# Altium PCB adapter_pcb.PcbDoc
Units mm, origin at the board's own origin, x right, y up, seen from the top; angles counter-clockwise.
Board outline 84.46 x 29.97 mm, 2 copper layers (Top Layer, Bottom Layer), stack 1.18 mm thick; 112 components, 43 nets, 254 pads, 4 vias.
Unrouted connection lines stored in the file: 2.
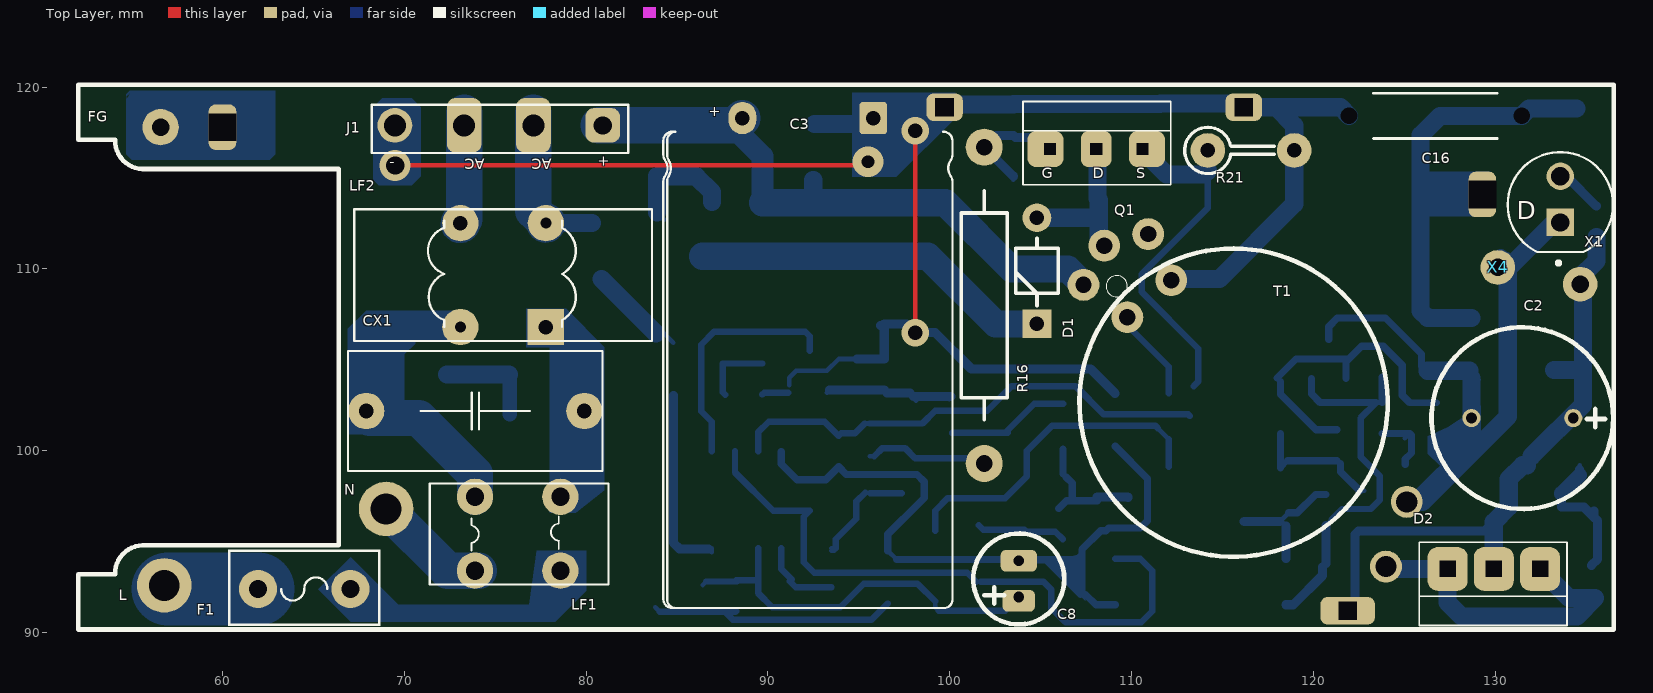
[diagram p0: Top Layer view]
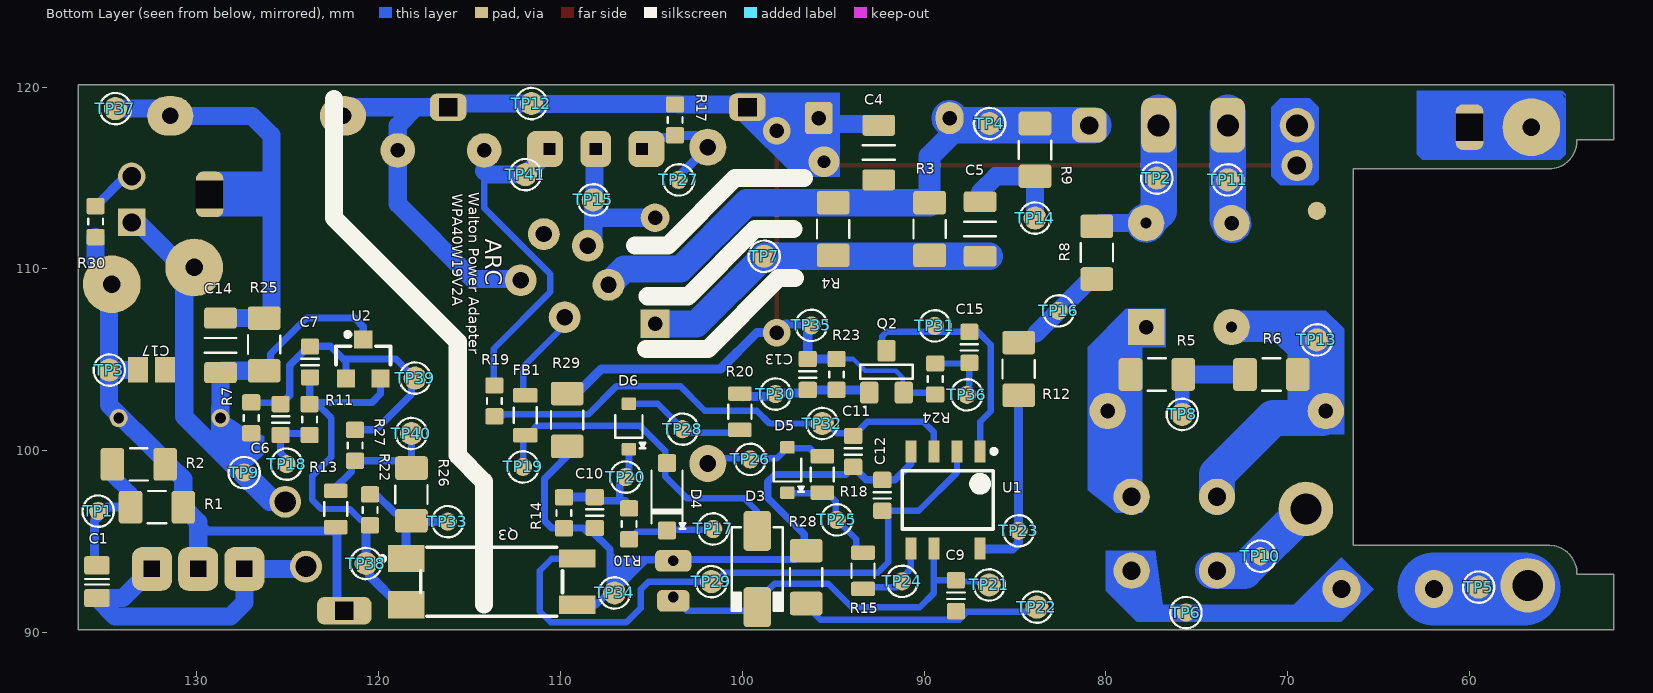
[diagram p1: Bottom Layer view, seen from below]

## Layer stack, top to bottom
Top Solder: solder mask 0.0102, Solder Resist, Dk 3.5
Top Layer: signal copper 0.0356
Dielectric 1: dielectric 1.1086, FR-4, Dk 4.8
Bottom Layer: signal copper 0.0356
Bottom Solder: solder mask 0.0102, Solder Resist, Dk 3.5

## Board outline
52.07,90.17 52.07,93.218 54.1,93.218 cw(c55.641,93.259) 55.6,94.8 66.4,94.8 66.4,115.5 55.6,115.5 cw(c55.65,117.05) 54.1,117.1 52.07,117.1 52.07,120.142 136.525,120.142 136.525,90.17

## Design rules (kind name [scope] priority, off if disabled: settings)
Clearance "Schematic Clearance Constraint" [InComponent('U1')] p1: gap=0.241 ignorepadtopadclearanceinfootprint=FALSE except(0: Arc-Hole Track-Hole SMDPad-Hole THPad-Hole Via-Hole Fill-Hole Poly-Hole Region-Hole Text-Hole)
Clearance [All] p2: gap=0.254 ignorepadtopadclearanceinfootprint=FALSE except(0: Arc-Hole Track-Hole SMDPad-Hole THPad-Hole Via-Hole Fill-Hole Poly-Hole Region-Hole Text-Hole)
PolygonConnect [All] p1: connectstyle=Relief reliefconductorwidth=0.254 reliefentries=4 polygonreliefangle="90 Angle" airgapwidth=0.254
RoutingVias [All] p1: holewidth=0.711 width=1.27 viastyle="Through Hole" minholewidth=0.711 minwidth=1.27 maxholewidth=0.711 maxwidth=1.27
SolderMaskExpansion [All] p1: expansion=0.102
Width [All] p1: maxlimit=2 minlimit=0.254 preferedwidth=0.254
30 further rules are at their usual default settings.

## Components (designator, comment, footprint, x,y, rotation, side; value= is the part's Value field where it differs from the comment)
C1 "approved sub OK" CAPC2012X135N 135.5,92.8 r90 bottom value=4µ7
C2 "680µ" CAPE4.7MM_Rad_10x17mm 131.5,101.8 r180 top
C3 "68µ" CAPAE400V68uF16X25 92.2,118.3 r180 top
C4 "approved sub OK" CAPC3216X180N 92.5,116.4 r90 bottom value=10µ
C5 "approved sub OK" CAPC3216X180N 86.922,112.2 r90 bottom value=10µ
C6 "10p" CAPC1608X90N 125.397,101.717 r270 bottom
C7 "10p" CAPC1608X90N 123.78,104.885 r270 bottom
C8 "22µ" CAPE2MM_Rad_5x11mm 103.8,92.95 r90 top
C9 "10p" CAPC1608X90N 88.25,92.03 r270 bottom
C10 "10p" CAPC1608X90N 108.118,96.601 r270 bottom
C11 "10p" CAPC1608X90N 93.9,99.967 r90 bottom
C12 "10p" CAPC1608X90N 92.3,97.55 r90 bottom
C13 "10p" CAPC1608X90N 96.4,104.2 r90 bottom
C14 "approved sub OK" CAPC3216X180N 128.7,105.8 r270 bottom value=10µ
C15 "10p" CAPC1608X90N 87.51,105.69 r270 bottom
C16 "=Value" CAPR9.5_CC 126.715,118.422 r0 top
C17 "approved sub OK" C0805 132.494,104.449 r0 bottom value=4µ7
CX1 "22n" CAPMPF0.22K275V-X2_0.22UF 73.907,102.188 r180 top
D "151054RS03000" LED_151054RS03000 133.587,113.83 r90 top
D1 "PR1007" "DO-41 - Bended Radial" 104.8,109.9 r90 top
D2 "DIODE_SCHOTTKY_V20120C_TH" DIODE_SCHOTTKY_V20120C_TH 132.43,92.3 r180 top value="Vf=1V @ 50mA"
D3 "DIODE_SCHOTTKY_10MQ100NPBF" DO-214AC 99.18,93.5 r270 bottom
D4 "100V; 1.5A" SOD123 104.143,97.47 r90 bottom value="Vf = 1.15V @ 1.5A (Max)"
D5 "DIODE_75V_500mW" SOD323 97.517,98.939 r90 bottom value="Vf=1V @ 50mA"
D6 "3.3V" SOD323 106.238,101.336 r90 bottom
F1 "Radial Lead Micro Fuse, 2.5A" FUSE_MST250 64.5,92.4 r0 top value=T2.5A250V
FB1 "600R @ 100 MHz" FBC2012N 111.934,101.95 r90 bottom
FG "Mot_A" THP_D38_T75_B125#1 56.6,117.8 r90 top (schematic designator E)
J1 "100V; 1.5A" BR_KBP208GL 75.2,117.9 r180 top value="Vf = 1.15V @ 1.5A (Max)"
L "Mot_A" THP_D38_T75_B125#2 56.8,92.6 r0 top (schematic designator X2)
LF1 "LF_Toroidal_TH" LF_Toroidal_TH 76.1,95.4 r90 top
LF2 "LF_AC_Common_Mode_Ferrite_magnet_Coil" LF_AC_Common_Mode_Ferrite_magnet_Coil 76.9,109.6 r90 top
N "Mot_A" THP_D38_T75_B125#2 69,96.8 r0 top (schematic designator X3)
Q1 "TK10A60D" MOS_TK10A60E 105.56,117.3 r0 top
Q2 "PMBS3904" SOT23-3 92.07,104.35 r90 bottom
Q3 "EL1018_TA_-VG" SOP4_Everlight_EL101X-G_MFG 113.789,92.8 r180 bottom
R1 "RES_NL_1206" RESC3216X70N 132.2,96.9 r180 bottom value=100R
R2 "RES_NL_1206" RESC3216X70N 133.2,99.257 r180 bottom value=100R
R3 "RES_NL_1206" RESC3216X70N 89.7,112.2 r270 bottom value=100K
R4 "RES_NL_1206" RESC3216X70N 95,112.2 r270 bottom value=100K
R5 "RES_NL_1206" RESC3216X70N 77.2,104.2 r180 bottom value=2M
R6 "RES_NL_1206" RESC3216X70N 70.9,104.2 r180 bottom value=2M
R7 "RES_NL_0603" RESC1608X55N 127.012,101.812 r90 bottom value="10.2K 1%"
R8 "RES_NL_1206" RESC3216X70N 80.5,110.9 r270 bottom value=0
R9 "Thick Film" RESC3216N_ZERO 83.9,116.55 r90 bottom value=0R
R10 "RES_NL_0603" RESC1608X55N 106.228,95.98 r90 bottom value=1K
R11 "RES_NL_0603" RESC1608X55N 123.8,101.715 r90 bottom value="1K 1%"
R12 "RES_NL_1206" RESC3216X70N 84.8,104.5 r270 bottom value=10K
R13 "Jumper" RESC2012N_ZERO 122.361,96.8 r90 bottom value=0R
R14 "RES_NL_0603" RESC1608X55N 109.811,96.585 r270 bottom value=100K
R15 "Thick Film" RESC2012X70N 93.36,93.4 r270 bottom value=0R
R16 "Metal Film" AXIAL-0.6-17.5mm 101.9,108 r90 top value=57.6R
R17 "RES_NL_0603" RESC1608X55N 103.7,118.2 r90 bottom value=10K
R18 "RES_NL_0805" RESC2012X70N 95.6,98.7 r90 bottom value=47R
R19 "RES_NL_0603" RESC1608X55N 113.638,102.744 r90 bottom value=499R
R20 "RES_NL_0805" RESC2012X70N 100.134,102.15 r270 bottom value=1K
R21 "Res_Com_radial_bended" "R1/4WD - p4.8" 114.201,116.52 r0 top
R22 "RES_NL_0603" RESC1608X55N 120.472,96.75 r270 bottom value="2.74K 1%"
R23 "RES_NL_0603" RESC1608X55N 94.82,104.2 r90 bottom value=10K
R24 "RES_NL_0603" RESC1608X55N 89.39,103.95 r270 bottom value=1.2K
R25 "RES_NL_1206" RESC3216X70N 126.3,105.85 r270 bottom value=1M
R26 "RES_NL_1206" RESC3216X70N 118.2,97.6 r90 bottom value=330R
R27 "RES_NL_0603" RESC1608X55N 121.3,100.3 r90 bottom value="68.1K 1%"
R28 "Thick Film" RESC3216X70N 96.49,93.05 r90 bottom value=0R
R29 "Thick Film" RESC3216N_ZERO 109.636,101.696 r90 bottom value=0R
R30 "RES_NL_0603" RESC1608X55N 135.572,112.604 r90 bottom value="1K 1%"
T1 "750811016" Transformer_THT_H_7PIN 114.6,102.65 r0 top
TP1 "TESTPOINT" TP-R60#1 135.43,96.68 r180 bottom
TP2 "TESTPOINT" TP-R60#2 77.2,115 r90 bottom
TP3 "TESTPOINT" TP-R60#2 134.815,104.439 r90 bottom
TP4 "TESTPOINT" TP-R60#2 86.4,118 r90 bottom
TP5 "TESTPOINT" TP-R60#2 59.5,92.5 r90 bottom
TP6 "TESTPOINT" TP-R60#1 75.6,91.1 r90 bottom
TP7 "TESTPOINT" TP-R60#2 98.8,110.7 r90 bottom
TP8 "TESTPOINT" TP-R60#2 75.8,102 r90 bottom
TP9 "TESTPOINT" TP-R60#1 127.4,98.8 r90 bottom
TP10 "TESTPOINT" TP-R60#1 71.5,94.2 r90 bottom
TP11 "TESTPOINT" TP-R60#2 73.3,114.9 r90 bottom
TP12 "TESTPOINT" TP-R60#2 111.6,119.1 r90 bottom
TP13 "TESTPOINT" TP-R60#2 68.4,106.1 r90 bottom
TP14 "TESTPOINT" TP-R60#2 83.9,112.8 r90 bottom
TP15 "TESTPOINT" TP-R60#2 108.2,113.8 r90 bottom
TP16 "TESTPOINT" TP-R60#1 82.6,107.7 r90 bottom
TP17 "TESTPOINT" TP-R60#1 101.6,95.7 r90 bottom
TP18 "TESTPOINT" TP-R60#1 125.065,99.263 r90 bottom
TP19 "TESTPOINT" TP-R60#1 112.06,99.112 r90 bottom
TP20 "TESTPOINT" TP-R60#1 106.418,98.552 r90 bottom
TP21 "TESTPOINT" TP-R60#2 86.42,92.62 r90 bottom
TP22 "TESTPOINT" TP-R60#2 83.8,91.4 r90 bottom
TP23 "TESTPOINT" TP-R60#1 84.8,95.6 r90 bottom
TP24 "TESTPOINT" TP-R60#1 91.21,92.82 r90 bottom
TP25 "TESTPOINT" TP-R60#1 94.8,96.2 r90 bottom
TP26 "TESTPOINT" TP-R60#1 99.564,99.527 r90 bottom
TP27 "TESTPOINT" TP-R60#1 103.5,114.9 r90 bottom
TP28 "TESTPOINT" TP-R60#1 103.285,101.188 r90 bottom
TP29 "TESTPOINT" TP-R60#2 101.7,92.8 r90 bottom
TP30 "TESTPOINT" TP-R60#1 98.17,103.12 r90 bottom
TP31 "TESTPOINT" TP-R60#1 89.41,106.87 r90 bottom
TP32 "TESTPOINT" TP-R60#2 95.6,101.5 r90 bottom
TP33 "TESTPOINT" TP-R60#1 116.2,96.1 r90 bottom
TP34 "TESTPOINT" TP-R60#2 107.029,92.18 r90 bottom
TP35 "TESTPOINT" TP-R60#1 96.2,106.9 r90 bottom
TP36 "TESTPOINT" TP-R60#1 87.65,103.08 r90 bottom
TP37 "TESTPOINT" TP-R60#2 134.485,118.819 r90 bottom
TP38 "TESTPOINT" TP-R60#2 120.7,93.8 r90 bottom
TP39 "TESTPOINT" TP-R60#2 118,104 r90 bottom
TP40 "TESTPOINT" TP-R60#2 118.2,100.95 r90 bottom
TP41 "TESTPOINT" TP-R60#2 111.93,115.19 r90 bottom
U1 "LD7750A-GR" SOP7_LD7750AGR 88.7,97.3 r270 bottom
U2 "TL431AIDBZR" SOT23_L 120.85,105.05 r90 bottom
X1 "Mot_A" THP_D38_T75_B125#3 134.677,109.164 r0 top
X4 "Mot_A" THP_D38_T75_B125#3 130.152,110.084 r0 top

## Footprints (in the part's own frame and the unit in brackets; to place one, negate y for a bottom-side part, rotate by r counter-clockwise, add the part's x,y. Pads: shape width x height; smd on the part's side, far side on the other; paste and mask are expansions set on the pad)
AXIAL-0.6-17.5mm [mil] "Axial Device, Thru-Hole; 2 Leads; 0.6 in Pin Spacing"
  round 80 hole 36: 1(-342.52,0) 2(342.52,0)
  silkscreen extent -248,-50 248,50
BR_KBP208GL [mm]
  rrect50% 1.91x1.91 hole 1: 1(-5.715,0)
  rrect50% 1.91x3 hole 1.2: 2(-1.905,0) 3(1.905,0)
  round 1.91 hole 1.2: 4(5.715,0)
  silkscreen extent -7.12,-1.14 7,1.52
C0805 [mm] "Chip Capacitor, Body 2.0x1.3mm, IPC High Density"
  rect 1.1x1.4 smd: 1(-0.75,0) 2(0.75,0)
  body extent -1.1,-0.72 1.1,0.72, height 1.4
CAPAE400V68uF16X25 [mil]
  round 20 on Mech15: 0(0,0)
  rrect25% 60x70 hole 31.5: 1(-141.73,0)
  oval 60x70 hole 31.5: 2(141.73,0)
  silkscreen extent -313,30 313,1061
CAPC1608X90N [mm] "Chip Capacitor, Body 1.6x0.8mm, EIA 0603, IPC Medium Density"
  round 0.254 on Mech15: 0(0,0)
  rrect25% 0.9x1 smd: 1(-0.85,0) 2(0.85,0)
  Top Layer pour cut-out: -0.6,0.5 -0.4,0.7 0.4,0.7 0.6,0.5 0.6,-0.5 0.4,-0.7 -0.4,-0.7 -0.6,-0.5
  silkscreen extent -0.18,-0.48 0.18,0.48, body extent -0.85,-0.45 0.85,0.45, height 0.89
CAPC2012X135N [mm] "Chip Capacitor, Body 2.0x1.2mm, EIA 0805, IPC Medium Density"
  round 0.254 on Mech15: 0(0,0)
  rrect25% 1x1.4 smd: 1(-0.9,0) 2(0.9,0)
  Top Layer pour cut-out: -0.675,0.7 -0.475,0.9 0.475,0.9 0.675,0.7 0.675,-0.7 0.475,-0.9 -0.475,-0.9 -0.675,-0.7
  silkscreen extent -0.15,-0.65 0.15,0.65, body extent -1.1,-0.72 1.1,0.73, height 1.34
CAPC3216X180N [mm] "Chip Capacitor, Body 3.2x1.6mm, 1.8mm H, EIA 1206, IPC Medium Density"
  round 0.508 on Mech15: 0(0,0)
  rrect25% 1.15x1.8 smd: 1(-1.5,0) 2(1.5,0)
  silkscreen extent -0.4,-0.88 0.4,0.88, body extent -1.7,-0.9 1.7,0.9, height 1.8
CAPE2MM_Rad_5x11mm [mm] "2mm Pitch Radial Capacitor"
  rrect50% 1.2x1.8 hole 0.6 copper offset -0.2,0: 1(-1,0)
  rrect50% 1.2x2 hole 0.6: 2(1,0)
  silkscreen extent -2.5,-2.5 2.5,2.5
CAPE4.7MM_Rad_10x17mm [mm] "2mm Pitch Radial Capacitor"
  round 1 hole 0.6: 1(-2.8,0) 2(2.8,0)
  silkscreen extent -5,-5 5,5
CAPMPF0.22K275V-X2_0.22UF [mm] "Capacitor, THT, Metallized Polyester Film with 7.2x3.0x6.5mm LxTxH"
  round 2 hole 0.8: 1(-6,0) 2(6,0)
  silkscreen extent -7,-3.3 7,3.3, body extent -6.9,-3.2 6.9,3.2, height 0.25
CAPR9.5_CC [mm] "Capacitor, CC, Thru-Hole, Dipped Radial; Body circuler Pin Spacing 9.5 mm (typ)"
  round 0 / inner round 0 / far side oval 2.54x2.159 hole 0.914 unplated: 1(-4.75,0) 2(4.75,0)
  silkscreen extent -3.4,-1.25 3.4,1.25
DIODE_SCHOTTKY_V20120C_TH [mm] "Connector; screwterm; 3 Position"
  rrect50% 2.2x2.4 hole 0.88 square: 1(-0.04,-1.2) 2(2.5,-1.2) 3(5.04,-1.2)
  silkscreen extent -1.53,-2.67 6.6,1.91
"DO-41 - Bended Radial" [mm] "Pitch- 5.8mm Lead dia- 0.8mm"
  round 1.575 hole 0.8: A(2.921,0)
  rect 1.575x1.575 / inner round 1.575 / far side rect 1.575x1.575 hole 0.8: K(-2.921,0)
  silkscreen extent -1.91,-1.17 1.78,1.17
DO-214AC [mm] "JEDEC DO214 variation AC. SMA"
  round 0.508 on Mech15: 0(0,0)
  rrect25% 2.2x1.5 smd: A(-2.1,0) K(2.1,0)
  silkscreen extent -2.3,-1.4 2.3,1.4, body extent -2.6,-1.3 2.6,1.3, height 2.42
FBC2012N [mm] "Ferrite Bead Chip, Body 2.0x1.2mm, 0805, IPC Medium Density"
  round 0.508 on Mech15: 0(0,0)
  rrect25% 0.8x1.35 smd: 1(-1.1,0) 2(1.1,0)
  silkscreen extent -0.43,-0.64 0.46,0.64, body extent -1,-0.62 1,0.63, height 0.9
FUSE_MST250 [mm]
  round 0.5 on Mech15: 0(0,0)
  round 2.1 hole 1: 1(-2.54,0) 2(2.54,0)
  silkscreen extent -4.19,-2.03 4.19,2.16, body extent -4.35,-2.16 4.35,2.29, height 0.25
LED_151054RS03000 [mm]
  round 1.508 hole 1: A(1.27,0)
  rect 1.508x1.508 hole 1: C(-1.27,0)
  silkscreen extent -3.6,-2.9 2.6,2.9
LF_AC_Common_Mode_Ferrite_magnet_Coil [mm]
  rect 2x2 hole 0.8: 1(-2.794,-0.889)
  round 2 hole 0.6: 2(2.921,-0.889) 3(-2.794,3.81)
  round 2 hole 0.8: 4(2.921,3.81)
  silkscreen extent -3.56,-6.73 3.68,9.65
LF_Toroidal_TH [mm]
  round 2 hole 1: 1(-1.994,-2.489) 2(2.07,-2.489) 3(-1.994,2.21) 4(2.07,2.21)
  silkscreen extent -2.76,-5.13 2.8,4.7
MOS_TK10A60E [mm] "Connector; screwterm; 3 Position"
  rrect50% 2x2 hole 0.64 square copper offset -0.25,0: 1(-0.04,-0.7)
  rrect50% 1.7x2 hole 0.64 square: 2(2.5,-0.7)
  rrect50% 2x2 hole 0.64 square copper offset 0.25,0: 3(5.04,-0.7)
  silkscreen extent -1.53,-2.67 6.6,1.91
"R1/4WD - p4.8" [mm] "R 1/4W, 2 Pin, Pitch - 4.8mm"
  round 1.905 hole 0.8: 1(0,0) 2(4.75,0)
  silkscreen extent -1.27,-1.28 3.65,1.28
RESC1608X55N [mm] "Chip Resistor, Body 1.6x0.8mm, EIA 0603, IPC Medium Density"
  round 0.254 on Mech15: 0(0,0)
  rrect25% 0.9x1 smd: 1(-0.85,0) 2(0.85,0)
  Top Layer pour cut-out: -0.6,0.5 -0.4,0.7 0.4,0.7 0.6,0.5 0.6,-0.5 0.4,-0.7 -0.4,-0.7 -0.6,-0.5
  silkscreen extent -0.15,-0.41 0.15,0.41, body extent -0.87,-0.47 0.88,0.48, height 0.54
RESC2012N_ZERO [mm] "Chip Resistor, Body 2.0x1.2mm, 0805, IPC Medium Density"
  round 0.254 on Mech15: 0(0,0)
  rrect25% 0.8x1.3 smd: 1(-1,0) 2(1,0)
  Top Layer pour cut-out: -0.725,0.65 -0.525,0.85 0.525,0.85 0.725,0.65 0.725,-0.65 0.525,-0.85 -0.525,-0.85 -0.725,-0.65
  silkscreen extent -0.38,-0.64 0.38,0.64, body extent -1.1,-0.67 1.1,0.68, height 0.69
RESC2012X70N [mm] "Chip Resistor, Body 2.0x1.2mm, EIA 0805, IPC Medium Density"
  round 0.254 on Mech15: 0(0,0)
  rrect25% 0.8x1.3 smd: 1(-1,0) 2(1,0)
  Top Layer pour cut-out: -0.725,0.65 -0.525,0.85 0.525,0.85 0.725,0.65 0.725,-0.65 0.525,-0.85 -0.525,-0.85 -0.725,-0.65
  silkscreen extent -0.38,-0.64 0.38,0.64, body extent -1.1,-0.67 1.1,0.68, height 0.69
RESC3216N_ZERO [mm] "Chip Resistor, Body 3.2x1.6mm, 1206, IPC Medium Density"
  round 0.508 on Mech15: 0(0,0)
  rrect25% 1.3x1.8 smd: 1(-1.45,0) 2(1.45,0)
  silkscreen extent -0.51,-0.89 0.51,0.89, body extent -1.62,-0.82 1.63,0.83, height 0.69
RESC3216X70N [mm] "Chip Resistor, Body 3.2x1.6mm, EIA 1206, IPC Medium Density"
  round 0.508 on Mech15: 0(0,0)
  rrect25% 1.3x1.8 smd: 1(-1.45,0) 2(1.45,0)
  silkscreen extent -0.51,-0.89 0.51,0.89, body extent -1.62,-0.82 1.63,0.83, height 0.69
SOD123 [mm] "SOD-123; 2 Leads; Body 2.7 x 1.6 mm, (LxW)"
  round 0.508 on Mech15: 0(0,0)
  rrect25% 1x1 smd: A(1.85,0) K(-1.85,0)
  silkscreen extent -1.75,-1 1.45,0.85, body extent -1.95,-0.9 1.95,0.9, height 1.18
SOD323 [mm] "SOD-323; 2 Leads; Body 1.8 x 1.35 mm, (LxW)"
  round 0.508 on Mech15: 0(0,0)
  rrect25% 0.7x0.8 smd: A(1.25,0) K(-1.25,0)
  silkscreen extent -1.2,-0.9 0.64,0.75, body extent -1.3,-0.68 1.3,0.67, height 1.1
SOP4_Everlight_EL101X-G_MFG [mm]
  rect 2x1.5 smd paste+0 mask+0: 1(-4.7,1.27) 2(-4.7,-1.27)
  rect 2x1 smd paste+0 mask+0: 3(4.7,-1.27) 4(4.7,1.27)
  silkscreen extent -6.13,-1.9 3.9,1.9, body extent -5.1,-1.8 5.1,1.8, height 2
SOP7_LD7750AGR [mm] "SOP, 7-Leads, Body 5x3.9mm, Pitch 1.27mm, IPC Medium Density"
  rect 1.2x0.6 smd: 1(-2.667,1.778) 2(-2.667,0.508) 3(-2.667,-0.762) 4(-2.667,-2.032) 5(2.667,-2.032) 6(2.667,-0.762) 8(2.667,1.778)
  silkscreen extent -2.79,-2.5 1.6,2.66, body extent -2,-2.5 2,2.5, height 1.76
SOT23-3 [mm] "SOT23, 3 pin"
  round 0.5 on Mech15: 0(0,0)
  rrect25% 1.2x1 smd: 1(-1.15,0.95) 2(-1.15,-0.95) 3(1.15,0)
  silkscreen extent -0.38,-1.45 0.38,1.45, body extent -1.4,-1.45 1.4,1.45, height 1.29
SOT23_L [mm] "SOT23, 3-Leads, Body 2.9x1.3mm, Pitch 0.95mm, Lead Span 2.3mm - Reverse Pinning, IPC High Density"
  rect 1x1 smd: 1(1.075,0) 2(-1.075,-0.95) 3(-1.075,0.95)
  silkscreen extent -0.3,-1.5 1.47,1.5, body extent -0.7,-1.5 0.7,1.5, height 1.1
THP_D38_T75_B125#1 [mm] "Thru-Hole Pad with 75mil top and 125mil bottom annular rings"
  round 2 / inner round 1.905 / far side round 3.175 hole 0.965: 1(0,0)
THP_D38_T75_B125#2 [mm] "Thru-Hole Pad with 75mil top and 125mil bottom annular rings"
  round 3 hole 1.7: 1(0,0)
THP_D38_T75_B125#3 [mm] "Thru-Hole Pad with 75mil top and 125mil bottom annular rings"
  round 1.905 / inner round 1.905 / far side round 3.175 hole 0.965: 1(0,0)
TP-R60#1 [mm]
  round 1 smd paste-1.27: 1(0,0)
  silkscreen extent -0.86,-0.86 0.86,0.86, body extent -0.76,-0.76 0.76,0.76, height 0.25
TP-R60#2 [mm]
  round 1.27 smd paste-1.27: 1(0,0)
  silkscreen extent -0.86,-0.86 0.86,0.86, body extent -0.76,-0.76 0.76,0.76, height 0.25
Transformer_THT_H_7PIN [mil]
  round 69 hole 35.43: 1(-240,340) 2(-285,255) 3(-145,365) 3(-95,265) 5(-190,185)
  round 69 hole 46: 6(415,-215) 9(370,-355)
  silkscreen extent -294,-334 374,334

## Part data
C1 C17: library part CAPC_4u7_0805, "Capacitor SMD Cer 4.7uF 10% 16V X5R 0805", Manufacturer 1="Taiyo Yuden", Manufacturer 2="Samsung Electro-Mechanics America, Inc", Manufacturer 3=Kemet, Manufacturer 4="Murata Electronics North America", Manufacturer 5="TDK Corporation", Manufacturer Part Number 1=EMK212BJ475KG-T, Manufacturer Part Number 2=CL21A475KOFNNNE, Manufacturer Part Number 3=C0805C475K4PACTU, Manufacturer Part Number 4=GRM21BR61C475MA88L, Manufacturer Part Number 5=C2012X5R1C475K125AC, Operating Temperature="-55°C ~ 85°C", Package / Case="0805 (2012 Metric)", Ratings="16V; X5R", Supplier Part Number 1=587-1294-1-ND, Tolerance=±10%, ComponentLink1Description=http://www.yuden.co.jp/productdata/catalog/en/mlcc01_e.pdf, ComponentLink1URL=http://www.yuden.co.jp/productdata/catalog/en/mlcc01_e.pdf, ComponentLink2Description=http://www.samsungsem.com/servlet/FileDownload?type=spec&file=CL21A475KOFNNNE.pdf, ComponentLink2URL=http://www.samsungsem.com/servlet/FileDownload?type=spec&file=CL21A475KOFNNNE.pdf, ComponentLink3Description=http://capacitoredge.kemet.com/capedge2/DataSheet?pn=C0805C475K4PACTU, ComponentLink3URL=http://capacitoredge.kemet.com/capedge2/DataSheet?pn=C0805C475K4PACTU, ComponentLink4Description=http://psearch.murata.com/capacitor/product/GRM21BR61C475MA88#.pdf, ComponentLink4URL=http://psearch.murata.com/capacitor/product/GRM21BR61C475MA88#.pdf, ComponentLink5Description=http://product.tdk.com/capacitor/mlcc/en/documents/mlcc_commercial_general_en.pdf, ComponentLink5URL=http://product.tdk.com/capacitor/mlcc/en/documents/mlcc_commercial_general_en.pdf, Material=ceramic, RoHS 1="RoHS Compliant", RoHS 2="RoHS Compliant", RoHS 3="RoHS Compliant", RoHS 4="RoHS Compliant", RoHS 5="RoHS Compliant", SCDType=spec, Size / Dimension="0.079\" L x 0.049\" W (2.00mm x 1.25mm)", Supplier 1=Digi-Key, Supplier 2=Digi-Key, Supplier 3=Digi-Key, Supplier 4=Digi-Key, Supplier 5=Digi-Key, Supplier Part Number 2=1276-1065-1-ND, Supplier Part Number 3=399-8101-1-ND, Supplier Part Number 4=490-7215-1-ND, Supplier Part Number 5=445-7640-1-ND, Thickness (Max)="0.053\" (1.35mm)"
C2: library part CAPE_680u_25V_THT, "Capacitor THT Alum Elec 680uF 25V", Manufacturer 1="Panasonic - ECG", Manufacturer Part Number 1=EEU-ED2D330, Package / Case=Radial, Ratings="200V; 105°C", Supplier Part Number 1=P13523-ND, Tolerance=±20%, Material=Al, SCDType=undef, Supplier 1=Digi-Key
C3: library part CAPE_68u_400V_THT, "Capacitor THT Alum Elec 68uF 20% 400V", Manufacturer 1="Panasonic - ECG", Manufacturer Part Number 1=EEU-ED2D330, Package / Case=Radial, Ratings="200V; 105°C", Supplier Part Number 1=P13523-ND, Tolerance=±20%, Material=Al, SCDType=undef, Supplier 1=Digi-Key
C4 C5 C14: library part CAPC_10u_1206_16V, "Capacitor SMD Cer 10uF 10% 16V X7R 1206", Manufacturer 1=Kemet, Manufacturer Part Number 1=C1206C106K4RACTU, Package / Case="1206 (3216 metric)", Ratings="16V; X7R", Supplier Part Number 1=399-3525-1-ND, Tolerance=±10%, Material=ceramic, SCDType=spec, Supplier 1=Digi-Key
C6 C7 C9 C10 C11 C12 C13 C15: library part CAPC_10p_0603_NP0_1%_50V, "Capacitor SMD Cer 10pF 5% 50V NP0 0603", Manufacturer 1="Murata Electronics North America", Manufacturer Part Number 1=GRM1885C1H100FA01J, Operating Temperature="-55°C ~ 125°C", Package / Case="0603 (1608 Metric)", Ratings="50V; NP0", Supplier Part Number 1=GRM1885C1H100FA01J-ND, Tolerance=±5%, SCDType=spec, Size / Dimension="0.063\" L x 0.032\" W (1.60mm x 0.81mm)", Supplier 1=Digi-Key, Thickness (Max)="0.035\" (0.90mm)"
C8: library part CAPE_22u_50V_THT, "Capacitor THT Alum Elec 22uF 50V", Manufacturer 1="Panasonic - ECG", Manufacturer Part Number 1=EEU-ED2D330, Package / Case=Radial, Ratings="200V; 105°C", Supplier Part Number 1=P13523-ND, Tolerance=±20%, Material=Al, SCDType=undef, Supplier 1=Digi-Key
C16: library part CAPC_4KVV_CR, "Capacitor THD Ceramic 4KV", Manufacturer 1="Panasonic - ECG", Manufacturer Part Number 1=ECQ-E1474KF, Package / Case="12.5L x 4.5T x 9.0H x 10.0mm Pitch", Ratings=100V, Supplier Part Number 1=EF1474-ND, Tolerance=±10%, Material="Metallized Polyester", SCDType=undef, Supplier 1=Digi-Key
CX1: library part CAPMPF_22n_250V_MP, "Safety Capacitor THD MP Film 22nF 10% 250V", Manufacturer 1="Panasonic - ECG", Manufacturer Part Number 1=ECQ-E2223KF, Package / Case="12.0L x 5.5T x 9.0H x 10.0mm Pitch", Ratings=250V, Supplier Part Number 1=EF2223-ND, Tolerance=±10%, Material="Metallized Polyester", SCDType=undef, Supplier 1=Digi-Key
D: "Red 623nm LED Indication - Discrete 1.9V Radial", Package="Radial Würth Elektronik", Availability=Unavailable, MF="Wurth Electronics", MP=151054RS03000, Price=None, SnapEDA_Link=https://www.snapeda.com/parts/151054RS03000/Wurth%20Electronics%20Inc./view-part/609365/?ref=snap
D1: "Fast Recovery Rectifier Diode, 2-Pin Axial_Lead, Pb-Free, Bulk Box", Manufacturer="On Semiconductor", PartNumber=1N4003FF, Supplier Part Number 1=863-1N4003FF, ComponentLink1Description="Manufacturer URL", ComponentLink1URL=http://www.onsemi.com/, ComponentLink2Description=Datasheet, ComponentLink2URL=http://www.onsemi.com/pub_link/Collateral/1N4001-D.PDF, ComponentLink3Description="Package Specification", ComponentLink3URL=http://www.onsemi.cn/pub_link/Collateral/59-10.PDF, DatasheetVersion="Rev. 13", IFSM Max (A)=30, IO(rec) Max (A)=1, Mounting Technology="Through Hole", PackageDescription="2-Pin, Axial Lead, Diameter 2.35 mm", PackageReference=AXIAL_LEAD-2-59-10, PackageVersion="Rev. U, 02/2005", Packing="Bulk Box", RoHS=TRUE, Supplier 1=Mouser, Type="Standard Recovery", VRRM Max (V)=200
D2: "SCHOTTKY RECTIFIER TO-220AB COMMON CATHODE THROUGH HOLE", Manufacturer="Micro Commercial Co", Manufacturer Part Number=V20120C, Package / Case=SOD323, Ratings="75V; 300mA; 0.5W", Supplier Part Number 1=1N4148WXTPMSCT-ND, Diode Type=Standard, Material=Si, SCDType=source, Supplier 1=Digi-Key
D3: "Diode Schottky SMD 100V 2A SMA", Manufacturer 1="Micro Commercial Co", Manufacturer Part Number 1=SS210-TP, Package / Case="DO-214AC, SMA", Ratings="100V; 2A", Supplier Part Number 1=SS210-TPMSCT-ND, Diode Type=Schottky, Material=Si, Mounting Type="Surface Mount", SCDType=source, Speed="Fast Recovery =< 500ns, > 200mA (Io)", Supplier 1=Digi-Key
D4: library part DIODE_switching_SJ_SOD_1-3, "surface mount switching diode L1N4148WT1G", Manufacturer 1="Diodes Inc", Manufacturer Part Number 1=SJ, Package / Case="DO-214AC, SMA", Supplier Part Number 1=S2BA-FDICT-ND, Diode Type=Standard, Material=Si, Ratings="100V; 1.5A", SCDType=source, Supplier 1=Digi-Key
D5: "Diode SMD 300mA 0.5W SOD323", Manufacturer="Micro Commercial Co", Manufacturer Part Number=1N4148WX-TP, Package / Case=SOD323, Ratings="75V; 300mA; 0.5W", Supplier Part Number 1=1N4148WXTPMSCT-ND, Diode Type=Standard, Material=Si, SCDType=source, Supplier 1=Digi-Key
D6: library part DIODE_ZENER_3V3_SOD323, "Diode Zener SMD 3.3V 200mW SOD-323", Manufacturer 1="ON Semiconductor", Manufacturer Part Number 1=MM3Z3V3ST1G, Package / Case=SOD-323, Ratings="3.3V; 0.2W; Vf=900mV @ 10mA", Supplier Part Number 1=MM3Z3V3ST1GOSCT-ND, Tolerance=±3%, Diode Type=Zener, Material=Si, SCDType=source, Supplier 1=Digi-Key
F1: library part FUSE_MST_2.5A_250V, "Radial Lead Micro Fuse, 2.5A TH", Manufacturer 1="Cooper Bussmann", Manufacturer Part Number 1=0603ESDA-TR1, Package / Case="0603 (1608 metric)", Supplier Part Number 1=283-2535-1-ND, Voltage - Clamping=35V, Voltage - Working=24V, ComponentLink1Description=http://www.cooperindustries.com/content/dam/public/bussmann/Electronics/Resources/Data%20Sheets/Bus_Elx_DS_4082_0603ESDA-TR.pdf, ComponentLink1URL=http://www.cooperindustries.com/content/dam/public/bussmann/Electronics/Resources/Data%20Sheets/Bus_Elx_DS_4082_0603ESDA-TR.pdf, SCDType=spec, Supplier 1=Digi-Key
FB1: library part FERRITE_WURTH_742792042, "Ferrite bead Wurth 742792042 SMD 200mA 0805", Current Rating=200mA, DC Resistance (DCR)="500 mOhm Max", Impedance @ Frequency="600 Ohm @ 100MHz", Manufacturer 1="WURTH ELEKTRONIK", Manufacturer Part Number 1=742792042, Package / Case="0805 (2012 Metric)", Ratings="200 mA; 500 mOhm DC", Supplier Part Number 1=08P2373, ComponentLink1Description=http://katalog.we-online.de/kataloge/eisos/media/pdf/742792042.pdf, ComponentLink1URL=http://katalog.we-online.de/kataloge/eisos/media/pdf/742792042.pdf, Filter Type="Differential Mode - Single", Height (Max)="0.041\" (1.05mm)", SCDType=source, Size / Dimension="0.063\" L x 0.031\" W (1.60mm x 0.80mm)", Supplier 1=Newark
FG L N X1 X4: library part Term1
J1: library part BR_KBP208GL_TH, "KBP208GL GLASS PASSIVATED BRIDGE RECTIFIER", Manufacturer 1="Diodes Inc", Package / Case="DO-214AC, SMA", Supplier Part Number 1=S2BA-FDICT-ND, Diode Type=Standard, Material=Si, Ratings="100V; 1.5A", SCDType=source, Supplier 1=Digi-Key
LF1: "Toroidal line filter common-mode choke TH", Manufacturer 1="Wurth Electronics Inc", Manufacturer Part Number 1=744232222, Package / Case="Horizontal, 4 PC Pad", Ratings="2.2k Ohms at 100MHz", Supplier Part Number 1=732-1474-1-ND, ComponentLink1Description="744232222 datasheet", ComponentLink1URL=http://katalog.we-online.de/kataloge/eisos/media/pdf/744232222.pdf, Height (Max)="0.083\" (2.10mm)", Impedance="2200 Ohm at 100 MHz", PackageDescription="SMD Inductor, 4-Leads, Body 1.8 x 3.4 mm", SCDType=source, Supplier 1=Digi-Key
LF2: "AC Common Mode Ferrite magnet Chokes", Manufacturer 1="Wurth Electronics Inc", Manufacturer Part Number 1=744232222, Package / Case="Horizontal, 4 PC Pad", Ratings="2.2k Ohms at 100MHz", Supplier Part Number 1=732-1474-1-ND, ComponentLink1Description="744232222 datasheet", ComponentLink1URL=http://katalog.we-online.de/kataloge/eisos/media/pdf/744232222.pdf, Height (Max)="0.083\" (2.10mm)", Impedance="2200 Ohm at 100 MHz", PackageDescription="SMD Inductor, 4-Leads, Body 1.8 x 3.4 mm", SCDType=source, Supplier 1=Digi-Key
Q1: library part MOSFET_N-CH_TK10A60D, "MOSFET N-Channel Power Switching TH", Manufacturer 1="Renesas Electronics America", Package / Case="8-WDFN exposed pad", Ratings="30V; 30A", Supplier Part Number 1=RJK03M7DPA-00#J5A, ComponentLink1Description=http://documentation.renesas.com/doc/products/transistor/r07ds0773ej0110_rjk03m7dpa.pdf, ComponentLink1URL=http://documentation.renesas.com/doc/products/transistor/r07ds0773ej0110_rjk03m7dpa.pdf, Manufacturer Part Number 1=TK10A60D, SCDType=undef, Supplier 1="QuadRep Northwest, Inc."
Q2: library part NPN_PMBS3904_PHILIPS, "Transistor SMD NPN 40V 100mA 250mW SOT23", Manufacturer 1="Fairchild Semiconductor", Manufacturer 2="NXP Semiconductors", Manufacturer Part Number 1=MMBT2222A, Package / Case=SOT-23, Ratings="40V; 600mA; 250mW", Supplier Part Number 1=MMBT2222AFSTR-ND, Manufacturer Part Number 2=MMBT2222A, Material=Si, Mounting Type="Surface Mount", SCDType=source, Supplier 1=Digi-Key, Supplier 2=Digi-Key, Supplier Part Number 2=568-4509-2-ND
R1 R2 R3 R4 R5 R6 R8 R12 R25 R26: "Resistor, SMD chip", Package / Case="1206 (3216 metric)"
R7 R10 R11 R14 R17 R19 R22 R23 R24 R27 R30: "Resistor, SMD chip", Package / Case="0603 (1608 metric)"
R9 R15 R28 R29: library part RES_0R_1206, "Resistor SMD chip 0.0 Ohm 0.25W 1206", Manufacturer 1=Vishay/Dale, Manufacturer Part Number 1=CRCW12060000Z0EA, Package / Case="1206 (3216 metric)", Ratings=1/4W, Supplier Part Number 1=541-0.0ECT-ND, Tolerance=±5%, SCDType=spec*\?, Supplier 1=Digi-Key
R13: library part RES_0R_0805, "Resistor SMD chip 0.0 Ohm 0.125W 0805", Manufacturer 1="Samsung Electro-Mechanics America, Inc", Manufacturer 2="Stackpole Electronics Inc", Manufacturer 3=Yageo, Manufacturer 4="Panasonic Electronic Components", Manufacturer 5="Rohm Semiconductor", Manufacturer Part Number 1=RC2012J000CS, Manufacturer Part Number 2=RMCF0805ZT0R00, Manufacturer Part Number 3=RC0805JR-070RL, Manufacturer Part Number 4=ERJ-6GEY0R00V, Manufacturer Part Number 5=MCR10ERTJ000, Package / Case="0805 (2012 metric)", Ratings=1/8W, Supplier Part Number 1=1276-5466-6-ND, Tolerance=N/A, ComponentLink1Description=http://www.samsungsem.com/servlet/FileDownload?filename=productcatalog/pdf/Chip_Resistor.pdf, ComponentLink1URL=http://www.samsungsem.com/servlet/FileDownload?filename=productcatalog/pdf/Chip_Resistor.pdf, ComponentLink2Description=http://www.seielect.com/Catalog/SEI-RMCF_RMCP.pdf, ComponentLink2URL=http://www.seielect.com/Catalog/SEI-RMCF_RMCP.pdf, ComponentLink3Description=http://media.digikey.com/pdf/Data%20Sheets/Yageo%20PDFs/RC0805%20Pb%20Free.pdf, ComponentLink3URL=http://media.digikey.com/pdf/Data%20Sheets/Yageo%20PDFs/RC0805%20Pb%20Free.pdf, ComponentLink4Description=http://industrial.panasonic.com/www-cgi/jvcr13pz.cgi?E+PZ+3+AOA0001+ERJ6GEY0R00V+7+WW, ComponentLink4URL=http://industrial.panasonic.com/www-cgi/jvcr13pz.cgi?E+PZ+3+AOA0001+ERJ6GEY0R00V+7+WW, ComponentLink5Description=http://rohmfs.rohm.com/en/products/databook/datasheet/passive/resistor/chip_resistor/mcr_g.pdf, ComponentLink5URL=http://rohmfs.rohm.com/en/products/databook/datasheet/passive/resistor/chip_resistor/mcr_g.pdf, RoHS 1="RoHS Compliant", RoHS 2="RoHS Compliant", RoHS 3="RoHS Compliant", RoHS 4="RoHS Compliant", RoHS 5="RoHS Compliant", SCDType=spec, Supplier 1=Digi-Key, Supplier 2=Digi-Key, Supplier 3=Digi-Key, Supplier 4=Digi-Key, Supplier 5=Digi-Key, Supplier Part Number 2=RMCF0805ZT0R00DKR-ND, Supplier Part Number 3=311-0.0ARDKR-ND, Supplier Part Number 4=P0.0ADKR-ND, Supplier Part Number 5=RHM0.0CPDKR-ND
R16: library part RES_10R_Axial_1W_5%, "Resistor THD 10 Ohm 1W 5% Metal Film", Manufacturer 1="Vishay/BC Components", Manufacturer Part Number 1=PR01000101009JR500, Package / Case="2.5x8.0mm DxL", Ratings=1W, Supplier Part Number 1=PPC10W-1CT-ND, Tolerance=±5%, SCDType=spec, Supplier 1=Digi-Key
R18 R20: "Resistor, SMD chip", Package / Case="0805 (2012 metric)"
R21: "4.59K +/-0.5%"
T1: "Flyback Converters For For AC/DC Converters SMPS Transformer 4500Vrms Isolation Through Hole", Package="Wurth Electronics", Availability=Unavailable, MF="Wurth Electronics", MP=750811016, Price=None, SnapEDA_Link=https://www.snapeda.com/parts/750811016/Wurth%20Electronics%20Midcom/view-part/2709313/?ref=snap
TP1 TP2 TP3 TP4 TP5 TP6 TP7 TP8 TP9 TP10 TP11 TP12 TP13 TP14 TP15 TP16 TP17 TP18 TP19 TP20 TP21 TP22 TP23 TP24 TP25 TP26 TP27 TP28 TP29 TP30 TP31 TP32 TP33 TP34 TP35 TP36 TP37 TP38 TP39 TP40 TP41: "SMD test pin"
U1: library part PWM_CONT_LD7750A-GR, "PWM CONTROLLER LD7750AGR SOP-7", Manufacturer 1="ON Semiconductor", Manufacturer Part Number 1=CAT93C46YI-G, Operating Temperature="-40°C ~ 85°C", Package / Case=8-TSSOP, Supplier Part Number 1=CAT93C46YI-G-ND, Voltage - Supply="1.8 V ~ 5.5 V", ComponentLink1Description=http://www.onsemi.com/pub_link/Collateral/CAT93C46-D.PDF, ComponentLink1URL=http://www.onsemi.com/pub_link/Collateral/CAT93C46-D.PDF, Format - Memory="EEPROMs - Serial", Interface="Microwire, 3-Wire Serial", Memory Size="1K (128 x 8 or 64 x 16)", Memory Type=EEPROM, Rule="Clearance Constraint [Clearance = 9.5mil]", SCDType=spec, Speed=2MHz, Supplier 1=Digi-Key, Supplier Device Package=8-TSSOP
U2: "Adjustable Precision Shunt Regulator, 34 ppm / degC, 100 mA, -40 to 85 degC, 3-pin SOT-23 (DBZ), Green (RoHS & no Sb/Br)", Manufacturer="Texas Instruments", Rating=Catalog, Temp Coeff(Max)(ppm/ degree C)=92, Temp Coeff(Typ)(ppm/ degree C)=34, Code_JEDEC=TO-236, ComponentLink1Description="Manufacturer URL", ComponentLink1URL=http://www.ti.com/, ComponentLink2Description=Datasheet, ComponentLink2URL=http://www.ti.com/general/docs/lit/getliterature.tsp?genericPartNumber=TL431A&fileType=pdf, ComponentLink3Description="Package Specification", ComponentLink3URL=http://www.ti.com/litv/pdf/mpds108a, DatasheetVersion=SLVS543M, Eco-Plan="Green (RoHS & no Sb/Br)", Initial Accuracy @ 25/deg C(%)=1, Iout/Iz(Max)(mA)=100, Min Iz for Regulation(uA)=600, Mounting Technology="Surface Mount", PackageDescription="3-Pin Plastic Small Outline, Body 2.92 x 1.3 mm, Pitch 0.95 mm", PackageReference=DBZ3, PackageVersion=4203227/B, PartNumber=TL431AIDBZR, SubFamily="Shunt Voltage Reference", VO Adj(Max)(V)=36, VO Adj(Min)(V)=2.495

## Free pads (board coordinates)
  round 1 smd far side paste+0 mask+1: 4(68.4,113.2)
  rrect50% 1.524x2.5 hole 1.5 square: 7(60,117.8)
  rrect50% 1.5x2.5 hole 1.5 square: 8(129.3,114.1)
  rrect50% 2x1.5 hole 1 square: 9(99.72,118.9) 10(116.18,118.9)
  rrect50% 3x1.5 hole 1 square: 11(121.89,91.2)

## Via types
v1: diameter 1.5, hole 0.8, Top Layer to Bottom Layer, 2 vias
v2: diameter 1.7, hole 0.711, Top Layer to Bottom Layer, 1 vias
v3: diameter 1.7, hole 1, Top Layer to Bottom Layer, 1 vias

## Nets (pads, with @x,y where several pads share a name; then routed paths per layer and width w, separated by ;. In a path a pad name is that pad's centre, name@x,y a point inside that pad or via, vN(x,y) a via of type N, cw(c..) or ccw(c..) an arc to the next point about the centre after c; other vN are vias at no path point)
GND: C2.2 C3.1 C4.2 C13.2 C14.2 C16.1 C17.1 D.C J1.4 pad.9 pad.10 Q2.2 R7.1 R17.2 R21.2 R23.2 R24.2 R25.2 R29.2 T1.3 T1.6 TP9.1 TP12.1 TP35.1 U2.1 X4.1 | length 150.7
  Top Layer w0.254: v3(69.5,115.7) 94.9,115.7 95.1,115.9 v2(95.5,115.9) ; v1(98.1,106.5) v1(98.1,117.6)
  Bottom Layer w0.254: v3@69.485,115.715 v3(69.5,115.7) ; Q2.2@91.17,103.61 91.17,104.02 91.55,104.4 93.25,104.4 93.9,105.05 R23.2 R23.2@94.9,105.05 ; C4.2 C4.2@92.566,117.966 ; v2@95.328,116.128 95.328,116.072 v2(95.5,115.9) ; C3.1@95.328,117.828 95.466,117.966 C3.1 95.8,118.294 C3.1@96.43,117.664 ; v1@97.62,106.98 v1(98.1,106.5) ; v1@98.036,117.664 v1(98.1,117.6) 98.6,118.1 99.4,118.1 ; R17.2@103.5,119.05 R17.2@103.525,119.075 ; TP12.1@111.575,119.075 TP12.1 ; T1.6 128.7,100.748 C2.2 ; R25.2@125.954,104.656 126.21,104.4 R25.2 ; C14.2@128.6,104.4 C14.2 ; C14.2@128.883,104.3 C14.2 ; C14.2@129.1,103.9 C14.2
  Bottom Layer w0.35: R24.2@89.7,103.1 89.8,103.2 Q2.2
  Bottom Layer w0.4: U2.1 120.85,106.829 121.321,107.3 123.973,107.3 125.954,105.319 R25.2@125.954,104.656
  Bottom Layer w0.5: R23.2@94.9,105.05 C13.2 TP35.1@96.4,106.7 ; TP35.1 TP35.1@96.4,106.7 ; v1@97.62,106.98 96.4,106.98 TP35.1@96.4,106.7 ; v1(98.1,106.5) 99.2,106.5 101.2,104.5 107.75,104.5 R29.2@109.1,103.15
  Bottom Layer w0.8: X4.1@130.31,110.69 X4.1@130.534,110.466 ; X4.1@130.7,110.3 X4.1@130.845,110.155
  Bottom Layer w1: v3@69.485,115.715 J1.4 ; C4.2@92.566,117.966 C3.1@95.466,117.966 ; v2@95.328,116.128 C3.1@95.328,117.828 ; C3.1@96.43,117.664 v1@98.036,117.664 ; 99.4,118.1 100.35,119.05 R17.2@103.5,119.05 ; R17.2@103.525,119.075 TP12.1@111.575,119.075 ; TP12.1 pad.10@116.18,119.1 ; T1.3@112.187,109.381 112.26,109.454 114.833,109.454 118.95,113.571 118.95,117.889 117.939,118.9 ; pad.10 117.939,118.9 ; C16.1 121.487,118.9 117.939,118.9 ; T1.6 126.006,97.189 130.7,101.883 X4.1@130.7,110.3 ; R25.2 C14.2@128.6,104.4 ; C2.2 C14.2@128.7,104 ; X4.1 X4.1@130.534,110.466 ; X4.1@130.845,110.155 133.249,112.56 D.C
NetC1_1: C1.1 D2.1 D2.3 T1.9 | length 17.8
  Bottom Layer w1: T1.9 124.131,93.5 D2.3 127.39,91.662 128.159,90.893 134.493,90.893 C1.1 134.07,91.9 D2.1
NetC1_2: C1.2 R1.1 R2.1 TP1.1 | length 7.9
  Bottom Layer w0.254: R2.1@134.65,98.969 R2.1@134.65,99.2
  Bottom Layer w0.5: R1.1@133.65,97.65 R1.1 134.89,96.9 TP1.1@135.43,96.36 ; R2.1@134.65,98.65 R2.1@134.65,98.969 ; C1.2@135.3,93.7 135.64,94.04 135.64,96.15 TP1.1@135.43,96.36 ; TP1.1 TP1.1@135.43,96.36
  Bottom Layer w0.8: R1.1@133.65,97.65 R2.1@134.65,98.65
NetC3_1: C3.2 C4.1 J1.1 R3.1 R4.1 R9.2 T1.2 TP4.1 | length 34
  Bottom Layer w0.254: 88.6,117.3 C3.2 ; 92.5,113.65 92.5,114
  Bottom Layer w1: 92.5,114 C4.1
  Bottom Layer w1.2: 88.6,117.3 89.7,116.2 R3.1
  Bottom Layer w1.5: R3.1 92.5,113.65 R4.1 99.75,113.65 103.4,110 106.488,110 T1.2
  Bottom Layer w2: J1.1@80.7,117.9 J1.1 88.2,117.9 C3.2
NetC5_1: C5.1 D1.K R3.2 R4.2 TP7.1 | length 19.9
  Bottom Layer w1.5: C5.1@86.4,110.7 C5.1 95,110.7 TP7.1 102.521,106.979 D1.K
NetC5_2: C5.2 R9.1 TP14.1 | length 6.5
  Bottom Layer w0.254: TP14.1@83.9,113.1 TP14.1@84.3,112.7
  Bottom Layer w1: TP14.1@83.9,113.1 R9.1 86.06,115.1 86.922,114.238 C5.2
NetC6_1: C6.1 C7.1 R7.2 R27.2 TP39.1 U2.3 | length 17.8
  Bottom Layer w0.254: TP39.1 TP39.1@118.194,103.806 ; C7.1@123.8,105.75 C7.1@123.85,105.75
  Bottom Layer w0.354: C6.1@125.3,102.65 R7.2@126.8,102.65
  Bottom Layer w0.4: TP39.1 119.05,105.05 121.95,105.05 ; TP39.1@118.194,103.806 118.194,103.106 120.15,101.15 R27.2 ; U2.3 121.8,104.9 121.95,105.05 ; C7.1@123.8,105.75 122.65,105.75 121.95,105.05 ; C7.1@123.85,105.75 124.9,104.7 124.9,103.05 C6.1@125.3,102.65
NetC6_2: C6.2 R11.1 TP18.1 | length 3.6
  Bottom Layer w0.254: C6.2@125.039,100.689 C6.2@125.3,100.95
  Bottom Layer w0.4: R11.1@123.8,100.95 C6.2@125.3,100.95 ; TP18.1 125.065,99.548 125.397,99.88 C6.2
NetC7_2: C7.2 Q3.2 R11.2 R22.2 TP38.1 U2.2 | length 21.5
  Bottom Layer w0.254: TP38.1@120.506,93.606 TP38.1 ; R22.2@120.7,95.9 121.006,96.206 ; R11.2@123.45,102.65 R11.2@123.8,102.65
  Bottom Layer w0.354: 121.006,96.206 121.6,96.8 123.154,96.8 123.664,97.31 123.664,98.603 122.6,99.667 122.6,101.8 R11.2@123.45,102.65
  Bottom Layer w0.4: U2.2 119.9,103.14 120.39,102.65 R11.2@123.45,102.65 ; R11.2@123.8,102.65 C7.2@123.8,104.05
  Bottom Layer w0.5: Q3.2@118.5,91.53 118.895,91.53 120.506,93.141 TP38.1@120.506,93.606 ; TP38.1 R22.2@120.7,95.9
NetC8_1: C8.1 C9.1 D3.K TP21.1 U1.6 | length 21.7
  Bottom Layer w0.254: TP21.1 TP21.1@86.61,92.81 ; D3.K@99.2,91.717 99.2,91.4 D3.K@99.392,91.208
  Bottom Layer w0.354: TP21.1@86.61,92.81 C9.1@88.28,92.81 ; C9.1 89.462,92.88 ; U1.6 89.462,92.88 ; D3.K@99.2,91.717 98.225,92.692 95.272,92.692 93.98,91.4 90.24,91.4 89.462,92.178 89.462,92.88 ; D3.K@99.392,91.208 103.058,91.208 103.5,91.65 C8.1@103.5,91.9
NetC10_1: C10.1 D6.K R10.2 R14.1 TP20.1 | length 7
  Bottom Layer w0.254: TP20.1@106.238,98.732 TP20.1
  Bottom Layer w0.4: R10.2@106.006,96.83 106.426,97.25 106.736,97.25 ; TP20.1@106.238,98.732 D6.K ; TP20.1 106.736,98.234 106.736,97.25 ; C10.1@108.118,97.25 106.736,97.25
  Bottom Layer w0.5: C10.1 109.795,97.451 R14.1
NetC11_2: C11.2 R19.1 TP32.1 U1.3 | length 27.2
  Bottom Layer w0.254: C11.2 C11.2@94.039,100.956 ; TP32.1@95.325,101.5 TP32.1
  Bottom Layer w0.354: U1.3 89.462,101.012 90.05,101.6 93.117,101.6 C11.2 ; C11.2@94.039,100.956 94.781,100.956 TP32.1@95.325,101.5 ; TP32.1 98.5,101.5 99.208,102.208 102.062,102.208 103.413,103.559 106.922,103.559 108.481,102 113.113,102 R19.1@113.199,101.914
NetC12_1: C12.1 Q3.4 TP29.1 U1.2 | length 35
  Bottom Layer w0.254: TP29.1@101.463,92.8 TP29.1
  Bottom Layer w0.354: U1.2 88.192,98.808 90.3,96.7 C12.1 91.98,96.38 91.98,93.87 92.55,93.3 100.963,93.3 TP29.1@101.463,92.8 ; TP29.1 105.16,92.8 105.598,92.362 105.598,92.024 105.598,91.338 106.374,90.562 110.532,90.562 111.15,91.18 111.15,93.4 110.48,94.07 Q3.4@109.1,94.07
NetC13_1: C13.1 Q2.1 R20.1 R23.1 TP30.1 | length 7.4
  Bottom Layer w0.254: Q2.1@93.25,103.2 Q2.1@93.4,103.35 ; C13.1 C13.1@96.563,103.187 ; TP30.1@97.813,103.187 TP30.1@98.025,102.975 ; TP30.1@98.15,102.75 TP30.1@98.225,102.825 ; R20.1@99.975,102.825 100.1,102.95 R20.1@100.075,102.975
  Bottom Layer w0.5: Q2.1@93.4,103.35 R23.1 C13.1 ; C13.1@96.563,103.187 TP30.1@97.813,103.187 ; TP30.1@98.025,102.975 R20.1@100.075,102.975
NetC14_1: C14.1 C16.2 pad.8 R25.1 TP37.1 | length 21.8
  Bottom Layer w1: C14.1 R25.1 125.904,107.696 125.904,117.352 126.974,118.422 C16.2 131.862,118.819 TP37.1
NetC15_1: C15.1 Q2.3 TP31.1 U1.1 | length 13.3
  Bottom Layer w0.35: U1.1 86.922,101.588 86.33,102.18 86.33,105.84 87.04,106.55 92.05,106.55 92.3,106.3 Q2.3@92.3,105.5
NetC15_2: C15.2 R24.1 TP36.1 | length 4
  Bottom Layer w0.35: TP36.1 87.51,103.22 87.51,104.8 R24.1@89.7,104.8
NetCX1_1: CX1.1 LF1.2 LF2.1 R5.1
NetCX1_2: CX1.2 LF1.4 LF2.3 R6.2 TP13.1 | length 19.1
  Bottom Layer w0.254: CX1.2@67.9,101.7 67.9,102 67.9,102.381 69.45,103.931 R6.2 69.45,104.469 68.594,105.325 68.594,105.906 TP13.1 69.106,106.806 LF2.3
  Bottom Layer w2: CX1.2@67.9,102 68.1,101.8 70.8,101.8 73.89,98.71 LF1.4
NetD1_2: D1.A Q1.2 T1.1 TP15.1 | length 9.4
  Bottom Layer w0.254: Q1.2@108.06,117.1 Q1.2@108.13,117.03 ; TP15.1@108.13,113.87 TP15.1
  Bottom Layer w1: D1.A 108.2,112.821 ; TP15.1@108.13,113.87 Q1.2@108.13,117.03 ; TP15.1 108.2,112.821 ; T1.1 108.2,111.59 108.2,112.821
NetD3_A: D3.A D4.A FB1.1 TP19.1 | length 18.6
  Bottom Layer w0.254: FB1.1@111.449,101.249 FB1.1@112.06,100.638
  Bottom Layer w0.354: D3.A@99.2,95.6 99.2,96.7 99.9,97.4 103.053,97.4 104.248,98.595 104.248,99.998 105.627,101.377 111.321,101.377 FB1.1@111.449,101.249 ; TP19.1 FB1.1@112.06,100.638
NetD4_K: D4.K R10.1 TP17.1 | length 4.9
  Bottom Layer w0.354: TP17.1@101.6,95.9 101.85,95.65 104.113,95.65 D4.K ; D4.K@104.143,95.55 105.808,95.55 R10.1
NetD5_A: D5.A R16.1 R18.2 TP26.1 | length 6.4
  Bottom Layer w0.254: R18.2 R18.2@95.85,99.7
  Bottom Layer w0.354: R18.2@95.85,99.7 96.3,100.15 97.541,100.15 98.097,99.594 R16.1@101.594,99.594
NetD5_K: D5.K R15.1 R18.1 TP25.1 | length 6.1
  Bottom Layer w0.254: R15.1@93.5,94.5 93.65,94.5 R15.1@93.5,94.65 ; TP25.1 TP25.1@94.866,96.266 ; R18.1@95.35,97.7 R18.1 R18.1@95.625,97.675 ; D5.K@97.375,97.675 D5.K@97.4,97.65
  Bottom Layer w0.354: R15.1@93.74,94.65 93.74,95.14 TP25.1 ; TP25.1@94.866,96.266 94.866,97.216 R18.1@95.35,97.7 ; R18.1@95.625,97.675 D5.K@97.375,97.675
NetD6_A: D6.A R20.2 TP28.1 | length 6.8
  Bottom Layer w0.254: R20.2@100.1,100.95 R20.2@100.15,101
  Bottom Layer w0.354: R20.2@100.15,101 103.2,101 103.2,101.132 104.654,102.586 ; 104.736,102.586 D6.A
NetD_A: D.A R30.2 | length 2.7
  Bottom Layer w0.5: D.A 133.926,115.1 R30.2
NetF1_1: F1.1 L.1 TP5.1 | length 5.5
  Bottom Layer w2: L.1 L.1@57,92.4 ; F1.1 F1.1@62.2,92.4
  Bottom Layer w4: L.1@57,92.4 F1.1
NetF1_2: F1.2 LF1.1 TP6.1 | length 5.4
  Bottom Layer w0.254: F1.2 68.04,91.4 ; 76.3,91 76.4,91.1 77.5,91.1 78.589,92.189 LF1.1
NetFB1_2: FB1.2 T1.5 | length 5.1
  Bottom Layer w0.35: T1.5 109.774,106.904 112.053,104.625 FB1.2@112.053,103.169
NetJ1_2: J1.2 LF2.2 R8.1 TP2.1 | length 15.1
  Bottom Layer w0.254: LF2.2@78.601,112.011 cw(c77.79,112.526) LF2.2@78.636,112.071 ; R8.1@80.329,112.521 R8.1
  Bottom Layer w1: LF2.2 R8.1@80.329,112.521
  Bottom Layer w2: J1.2@77.105,118.6 J1.2 77.105,113.205 LF2.2
NetJ1_3: J1.3 LF2.4 TP11.1 | length 12.1
  Bottom Layer w0.254: LF2.4@73.891,111.991 cw(c73.08,112.506) LF2.4@73.926,112.051
  Bottom Layer w2: LF2.4 73.295,112.726 J1.3 J1.3@73.295,118.6
NetLF1_3: LF1.3 N.1 TP10.1 | length 6.5
  Bottom Layer w2: N.1 72.394,93.406 LF1.3 LF1.3@74.1,93.406
NetQ1_1: Q1.1 R16.2 R17.1 TP27.1 | length 6.3
  Bottom Layer w0.254: TP27.1 TP27.1@103.5,115.1 ; Q1.1@105.395,117.225 Q1.1@105.52,117.1
  Bottom Layer w0.5: TP27.1@103.5,115.1 R16.2 102.55,117.35 R17.1@103.5,117.35 ; R17.1@103.625,117.225 Q1.1@105.395,117.225
NetQ1_3: Q1.3 R19.2 R21.1 TP41.1 | length 19.9
  Bottom Layer w0.354: R19.2@113.426,103.559 113.68,103.813 113.68,105.62 110.564,108.736 110.564,109.719 114.2,113.355 114.2,115.4
  Bottom Layer w1: Q1.3@110.6,117.1 110.6,116.74 110.38,116.74 TP41.1 113.99,115.19 114.2,115.4
NetQ3_1: Q3.1 R22.1 R26.1 TP33.1 | length 7.3
  Bottom Layer w0.254: R26.1@118.15,96.1 R26.1 ; R26.1@118.5,95.85 R26.1 ; R26.1@118.64,96.59 R26.1
  Bottom Layer w0.4: R26.1@118.64,96.59 119.125,96.59 120.135,97.6 R22.1@120.7,97.6
  Bottom Layer w0.5: TP33.1 R26.1@118.15,96.1 ; Q3.1@118.5,94.07 R26.1@118.5,95.85
NetR5_2: R5.2 R6.1 TP8.1 | length 5.6
  Bottom Layer w0.254: R5.2 R5.2@75.8,104.15
  Bottom Layer w0.8: TP8.1 R5.2@75.8,104.15
  Bottom Layer w1: R6.1 R5.2
NetR8_2: R8.2 R12.1 TP16.1 | length 5.7
  Bottom Layer w0.254: R8.2 R8.2@80.85,109.45 ; 83.849,106.451 84.299,106.451 R12.1
  Bottom Layer w1: R8.2@80.85,109.45 TP16.1 83.849,106.451
NetR12_2: R12.2 TP23.1 U1.8 | length 10.7
  Bottom Layer w0.254: U1.8@86.745,94.6 86.922,94.423 U1.8
  Bottom Layer w0.5: R12.2 TP23.1 84.8,94.95 85.15,94.6 U1.8@86.745,94.6
NetR13_2: R13.2 R26.2 R27.1 TP40.1 | length 7.6
  Bottom Layer w0.254: R26.2 R26.2@118.6,99.45 ; R27.1 121.35,99.45 R27.1@121.5,99.3 ; R13.2@122.55,97.8 122.7,97.8 R13.2@122.8,97.8
  Bottom Layer w0.4: R26.2 TP40.1 ; R26.2@118.6,99.45 R27.1 ; R27.1@121.5,99.3 121.5,98.85 R13.2@122.55,97.8
NetR15_2: R15.2 TP24.1 U1.5 | length 4.4
  Bottom Layer w0.354: U1.5 90.732,93.5 TP24.1@91.311,92.921 ; TP24.1 91.53,92.5 R15.2@93.5,92.5
V+: C2.1 C17.2 D2.2 pad.11 R1.2 R2.2 R13.1 R30.1 TP3.1 X1.1 | length 34.7
  Bottom Layer w0.254: R2.2@131.75,99.2 R2.2@132,99.2
  Bottom Layer w0.5: pad.11@122.3,91.2 122.3,95.4 122.494,95.594 129.444,95.594 129.93,96.08 ; R2.2@132,99.2 R2.2@132,99.7
  Bottom Layer w1: D2.2 129.93,96.08 R1.2 130.75,98.45 131.5,99.2 R2.2@131.75,99.2 ; R2.2@132,99.7 134.83,102.53 TP3.1@134.83,104.322 ; C17.2 134.703,104.449 TP3.1@134.83,104.322 ; X1.1 134.677,109.55 135.572,110.445 R30.1 ; X1.1@134.806,109.164 134.806,109.047 134.83,109.023 TP3.1@134.83,104.322
wire: C8.2 C10.2 C11.1 C12.2 Q3.3 R14.2 R28.2 R29.1 TP34.1 U1.4 | length 39.4
  Bottom Layer w0.254: 93.181,98.4 93.183,98.4 ; R28.2@96.6,94.5 R28.2@97.08,94.02 ; C8.2@103.38,94.02 103.5,93.9 C8.2@103.6,94 ; 107,94 107.1,94.1 ; TP34.1@107.2,92.1 TP34.1@107.475,92.1
  Bottom Layer w0.4: U1.4 90.732,99.268 91.6,98.4 C12.2 93.181,98.4 ; 93.183,98.4 C11.1 94.317,98.7 98.2,98.7 98.6,98.3 98.6,97.4 98.354,97.154 98.352,97.154 96.6,95.402 R28.2@96.6,94.5 ; R28.2@97.08,94.02 C8.2@103.38,94.02 ; C8.2@103.6,94 105.3,94 TP34.1@107.2,92.1 ; 105.4,94 107,94 ; 107.1,94.1 107.272,94.272 107.272,94.568 108.303,95.599 108.599,95.599 108.75,95.75 110.486,95.75 110.882,96.146 110.882,98.468 R29.1@109.1,100.25 ; TP34.1@107.475,92.1 108.045,91.53 Q3.3 Q3.3@109.1,91.53
wire2: C9.2 R28.1 TP22.1 | length 14.1
  Bottom Layer w0.254: TP22.1 TP22.1@84.05,91.15
  Bottom Layer w0.354: TP22.1@84.05,91.15 87.63,91.15 ; C9.2 88.22,91.15 87.63,91.15 ; R28.1@96.6,91.6 95.7,90.7 88.08,90.7 87.63,91.15
pads on no net: C1.0 C3.0 C4.0 C5.0 C6.0 C7.0 C9.0 C10.0 C11.0 C12.0 C13.0 C14.0 C15.0 D3.0 D4.0 D5.0 D6.0 F1.0 FB1.0 FG.1 Q2.0 R1.0 R2.0 R3.0 R4.0 R5.0 R6.0 R7.0 R8.0 R9.0 R10.0 R11.0 R12.0 R13.0 R14.0 R15.0 R17.0 R18.0 R19.0 R20.0 R22.0 R23.0 R24.0 R25.0 R26.0 R27.0 R28.0 R29.0 R30.0

## Polygon pours and split planes (outlines as drawn)
no net on Bottom Layer "Bottom Layer-No Net" (solid, pour order 6): 75.9,111.7
no net on Bottom Layer "Bottom Layer-No Net 1" (solid, pour order 4): 75.9,111.7
no net on Bottom Layer "Bottom Layer-No Net 2" (solid, pour order 0): 76.2,117.9

## Keep-outs
Bottom Layer:
  region: 133.5,110.4

## Other copper
Bottom Layer:
  rectangle net NetC14_1: 126.129,112.887 129.778,115.349
  region net NetCX1_2: 73.6,106 73.6,107.7 67.9,107.7 66.9,106.7 66.9,100.9 70,100.9 70,105.3 70.6,105.9 70.6,106
  region net GND: 68.3,118.9 68.8,119.4 70.4,119.4 70.9,118.9 70.9,115.1 70.4,114.6 68.6,114.6 68.3,114.9
  region: 54.7,119.3 54.7,119.6 54.9,119.8 62.9,119.8 62.9,116.3 62.6,116 55,116 54.7,116.3 54.7,119.5 54.967,119.7
  region net GND: 128,98.2
  region net GND: 128.7,99.25
  region net GND: 129.6,98.685
  region net V+: 132.3,100.7 133.7,100.7 133.1,101.5
  region net wire: 105.216,93.803 105.416,93.803 107.468,91.751 107.468,94.389
  region net GND: 94.65,119.7 100.3,119.7 100.3,118.3 97.06,115.06 94.65,115.06
  region net GND: 129.205,102.468 127.4,101.3 126.3,100.811 126.3,99.85 126.982,99.169 128.462,100.649 129.205,100.649
  region net NetC3_1: 83.3,118.5
  region: 80.1,121.7
  region: 80.1,121.7
  region: 76.2,114
  region net NetCX1_1: 81,105.7 78.9,107.8 76.7,107.8 76.7,105.7
  region net NetCX1_1: 78,96.6 78,105.8 81,105.7 81,97.822 79.429,96.6
  region net NetCX1_2: 70.2,106.7
  region: 69.3,108.3
  region: 69.5,109.1
  region: 73.9,96.9
  region: 69.4,94
  region net NetF1_2: 75.8,91.532 76.877,91.532 77.3,94.5 80,94.5 80,92.3 78.3,90.6 75.8,90.6
  region net NetF1_2: 76.25,91.532 69.668,91.532 67.05,94.15 65.275,92.375 67.05,90.6 76.25,90.6
  region net NetF1_2: 68.04,91.4
  region: 69.6,90.9
  region net NetF1_2: 67.5,92.7 67.5,92.3 68.4,91.4 68.05,91.05 66.6,92.2

## Silkscreen, mask and mechanical layers (free items; w line width, h text height)
Top Overlay:
  the board outline again, w0.254
Bottom Overlay:
  lines w1: 96.6,115 100.4,115 104.1,111.3 105.9,111.3 ; 97.1,109.5 98,109.5 101.9,105.6 105.3,105.6 ; 97.2,112.2 99.3,112.2 103,108.5 105.2,108.5 ; 114.215,91.553 114.215,98.307 114.25,98.342 115.649,99.741 115.649,105.997 122.461,112.809 122.461,119.347
  text "Walton Power Adapter" at 115.248,114.228 h1 r90
  text "WPA40W19V2A" at 116.136,114.139 h1 r90
  text "ARC" at 114.432,111.654 h1.54 r90

## Text inside footprints (layer, text, board x,y; h text height)
C3: Top Overlay "+" at 87.4,119.1 h1 r180
J1: Top Overlay "-" at 69.485,116.249 h1 r180; Top Overlay "+" at 81.296,116.376 h1 r180; Top Overlay "AC" at 74.438,116.249 h1 r180; Top Overlay "AC" at 78.121,116.249 h1 r180
Q1: Top Overlay "G" at 105.06,114.8 h1; Top Overlay "D" at 107.86,114.8 h1; Top Overlay "S" at 110.26,114.8 h1